# Altium PCB micro8051.PcbDoc (part 2 of 2)
Units mm, origin at the board's own origin, x right, y up, seen from the top; angles counter-clockwise.
Board outline 37 x 60 mm, 2 copper layers (Top Layer, Bottom Layer); 67 components, 71 nets, 314 pads, 101 vias.
Unrouted connection lines stored in the file: 2.
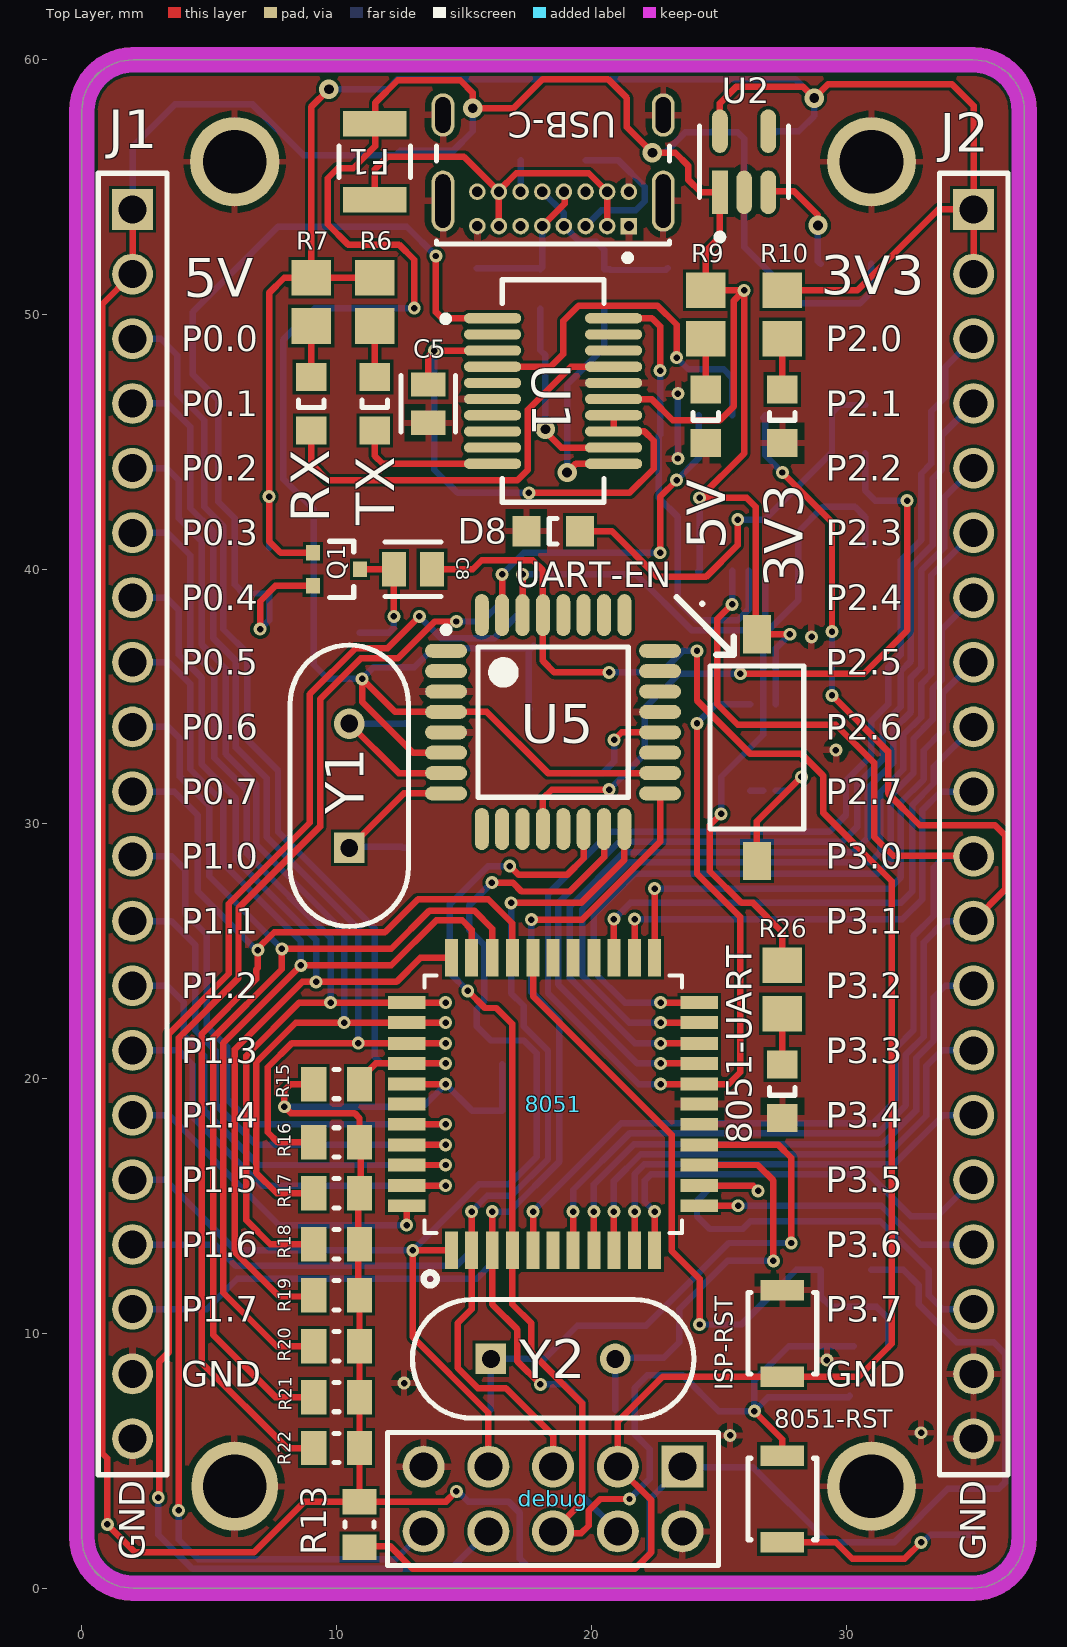
[diagram p0: Top Layer view]

## Via types
v1: diameter 0.508, hole 0.254, Top Layer to Bottom Layer, 94 vias
v2: diameter 0.762, hole 0.381, Top Layer to Bottom Layer, 7 vias

## Nets (pads, with @x,y where several pads share a name; then routed paths per layer and width w, separated by ;. In a path a pad name is that pad's centre, name@x,y a point inside that pad or via, vN(x,y) a via of type N, cw(c..) or ccw(c..) an arc to the next point about the centre after c; other vN are vias at no path point) (continued)
UART-DOWN-TX: (continued)
  Top Layer w0.254: U1.4 16.198,47.952 16.25,47.9 16.302,47.952 18.403,47.952 18.9,48.45 18.9,49.75 19.5,50.35 22.6,50.35 23.35,49.6 23.35,48.311 v1(23.346,48.307)
  Bottom Layer w0.254: v1(23.346,48.307) 23.804,47.85 25.2,47.85 25.525,47.525 U3.3
USBC-DM-R: C2.2 R2.1 USB-C.A7 USB-C.B7 | length 6
  Top Layer w0.254: USB-C.A7 18.95,54.35 18.95,54.8 USB-C.B7
  Bottom Layer w0.254: C2.2 17.95,51.825 R2.1 18.075,51.85 USB-C.A7
USBC-DP-R: C1.2 R1.1 USB-C.A6 USB-C.B6 | length 7
  Bottom Layer w0.254: USB-C.B6 18.925,53.975 USB-C.A6@18.925,53.575 ; USB-C.A6@18.9,53.6 USB-C.A6@18.925,53.575 ; C1.2 22.925,51.75 20.75,51.75 20.725,51.775 R1.1 20.5,52.55 20.2,52.85 19.55,52.85 USB-C.A6 USB-C.A6@18.925,53.575
USBDM: R2.2 U1.12 | length 7.8
  Top Layer w0.254: v2(18.2,45.5) 18.2,45.4 18.823,44.777 U1.12
  Bottom Layer w0.254: R2.2 18,48.6 18.2,48.4 v2(18.2,45.5)
USBDP: R1.2 U1.11 | length 9
  Top Layer w0.254: v2(19.05,43.8) 19.4,44.15 20.55,44.15 20.558,44.142 U1.11
  Bottom Layer w0.254: v2(19.05,43.8) 19.05,47.25 20.5,48.7 R1.2
XTAL1: 8051.15 C16.1 Y2.1 | length 22.8
  Top Layer w0.254: 8051.15@24.25,17.4 27.35,17.4 27.85,16.9 v1(27.85,13.55)
  Bottom Layer w0.254: C16.1 Y2.1 18.15,9 19.45,10.3 22.15,10.3 25.4,13.55 v1(27.85,13.55)
XTAL2: 8051.14 C17.1 Y2.2 | length 16.9
  Top Layer w0.254: 8051.14 26.538,16.612 27.15,16 v1(27.15,12.85)
  Bottom Layer w0.254: C17.1 Y2.2 20.99,9.05 22.85,9.05 23.45,9.65 23.45,10.95 25.35,12.85 v1(27.15,12.85)
pads on no net: 8051.6 8051.26 8051.27 8051.28 8051.39 U1.2 U1.5 U1.7 U1.8 U1.9 U1.18 U1.19 U2.4 U3.2 U3.4 U3.11 U3.15 U5.1 U5.2 U5.9 U5.10 U5.11 U5.13 U5.19 U5.22 U5.23 U5.24 U5.25 U5.26 U5.27 U5.28 U5.32 USB-C.A8 USB-C.B8

## Polygon pours and split planes (outlines as drawn)
GND on Bottom Layer "gnd-bottom" (solid, pour order 1): 0,60 37,60 37,0 0,0
GND on Top Layer "gnd-top" (solid, pour order 0): 0,60 37,60 37,0 0,0

## Keep-outs
Keep-Out Layer:
  lines w1: 2,60 ccw(c2,58) 0,58 0,2 ccw(c2,2) 2,0 35,0 ccw(c35,2) 37,2 37,58 ccw(c35,58) 35,60 2,60 ; 2,60 2,60

## Silkscreen, mask and mechanical layers (free items; w line width, h text height)
Top Overlay:
  lines w0.254: 23.35,38.9 25.6,36.65 ; 24.9,36.65 25.6,36.65 ; 25.6,37.35 25.6,36.65 ; 24.35,38.65 24.35,38.65
  text "3V3" at 29.004,50.804 h1.52
  text "5V" at 4.004,50.704 h1.52
  text "P0.0" at 3.904,48.554 h1
  text "P2.0" at 29.204,48.554 h1
  text "P0.1" at 3.904,46.014 h1
  text "P2.1" at 29.204,46.014 h1
  text "P0.2" at 3.904,43.474 h1
  text "P2.2" at 29.204,43.474 h1
  text "P0.3" at 3.904,40.934 h1
  text "P2.3" at 29.204,40.934 h1
  text "P0.4" at 3.904,38.394 h1
  text "P2.4" at 29.204,38.394 h1
  text "P0.5" at 3.904,35.854 h1
  text "P2.5" at 29.204,35.854 h1
  text "P0.6" at 3.904,33.314 h1
  text "P2.6" at 29.204,33.314 h1
  text "P0.7" at 3.904,30.774 h1
  text "P2.7" at 29.204,30.774 h1
  text "P1.0" at 3.904,28.234 h1
  text "P3.0" at 29.204,28.234 h1
  text "P1.1" at 3.904,25.694 h1
  text "P3.1" at 29.204,25.694 h1
  text "P1.2" at 3.904,23.154 h1
  text "P3.2" at 29.204,23.154 h1
  text "P1.3" at 3.904,20.614 h1
  text "P3.3" at 29.204,20.614 h1
  text "P1.4" at 3.904,18.074 h1
  text "P3.4" at 29.204,18.074 h1
  text "P1.5" at 3.904,15.534 h1
  text "P3.5" at 29.204,15.534 h1
  text "P1.6" at 3.904,12.994 h1
  text "P3.6" at 29.204,12.994 h1
  text "P1.7" at 3.904,10.454 h1
  text "P3.7" at 29.204,10.454 h1
  text "GND" at 3.904,7.914 h1
  text "GND" at 29.204,7.914 h1
  text "GND" at 2.476,1.104 h1 r90
  text "GND" at 35.496,1.104 h1 r90
Bottom Overlay:
  text "by D. Gusev" at 29.652,14.324 h1.52 r270
  text "micro8051 Rev5" at 31.804,14.304 h1.52 r270